# EAGLE board CT_schematic (EAGLE 7.6.0)

Size 100 x 80 mm. Coordinates in mm from the lower left corner, seen from the top.
Outline: 0,0 100,0 100,80 0,80 0,0
Copper layers (1*16): Top 0.035mm / dielectric 1.5mm / Bottom 0.035mm
Design rules "default": minimum track width 10mil, minimum drill 24mil, track to track 8mil, track to pad 8mil, pad to pad 8mil, via to via 8mil, smd to smd 8mil, copper to edge 40mil, drill to drill 8mil, minimum pad ring 10mil, minimum via ring 8mil, stop-mask expansion 4mil, vias tented up to drill 0mil, thermal gap 10mil

## Footprints (pad centres in the part's own frame; a part is rotated, then mirrored left to right if it is on the bottom)
C0603 = smd 0.8 x 0.8: 1 -0.762,0; 2 0.762,0
C0402 = smd 0.5 x 0.5: 1 -0.508,0; 2 0.508,0
C0805 = smd 1.2 x 1.3: 1 -1.016,0; 2 1.016,0
C1206 = smd 1.3 x 1.6: 1 -1.524,0; 2 1.524,0
L0603 = smd 0.8 x 0.8: 1 -0.762,0; 2 0.762,0
L1210 = smd 1.2 x 2.5: 1 -1.524,0; 2 1.524,0
L0806 = smd 1.016 x 1.524: 1 -0.889,0; 2 0.889,0
R0603 = smd 0.8 x 0.8: 1 -0.762,0; 2 0.762,0
UFQFPN48 = smd 0.559 x 0.305: 1 -3.375,2.751; 2 -3.375,2.251; 3 -3.375,1.75; 4 -3.375,1.25; 5 -3.375,0.75; 6 -3.375,0.25; 7 -3.375,-0.25; 8 -3.375,-0.75; 9 -3.375,-1.25; 10 -3.375,-1.75; 11 -3.375,-2.251; 12 -3.375,-2.751; 25 3.375,-2.751; 26 3.375,-2.251; 27 3.375,-1.75; 28 3.375,-1.25; 29 3.375,-0.75; 30 3.375,-0.25; 31 3.375,0.25; 32 3.375,0.75; 33 3.375,1.25; 34 3.375,1.75; 35 3.375,2.251; 36 3.375,2.751 | smd 0.305 x 0.559: 13 -2.751,-3.375; 14 -2.251,-3.375; 15 -1.75,-3.375; 16 -1.25,-3.375; 17 -0.75,-3.375; 18 -0.25,-3.375; 19 0.25,-3.375; 20 0.75,-3.375; 21 1.25,-3.375; 22 1.75,-3.375; 23 2.251,-3.375; 24 2.751,-3.375; 37 2.751,3.375; 38 2.251,3.375; 39 1.75,3.375; 40 1.25,3.375; 41 0.75,3.375; 42 0.25,3.375; 43 -0.25,3.375; 44 -0.75,3.375; 45 -1.25,3.375; 46 -1.75,3.375; 47 -2.251,3.375; 48 -2.751,3.375 | smd 5.588 x 5.588: 49 0,0
SAMTEC_FTSH-105-01-L-DV-K = smd 0.762 x 2.794: 1 -2.54,-2.032; 2 -2.54,2.032; 3 -1.27,-2.032; 4 -1.27,2.032; 5 0,-2.032; 6 0,2.032; 7 1.27,-2.032; 8 1.27,2.032; 9 2.54,-2.032; 10 2.54,2.032
SSOP-16 = smd 1.981 x 0.356: 1 -2.464,2.223; 2 -2.464,1.587; 3 -2.464,0.953; 4 -2.464,0.318; 5 -2.464,-0.318; 6 -2.464,-0.953; 7 -2.464,-1.587; 8 -2.464,-2.223; 9 2.464,-2.223; 10 2.464,-1.587; 11 2.464,-0.953; 12 2.464,-0.318; 13 2.464,0.318; 14 2.464,0.953; 15 2.464,1.587; 16 2.464,2.223
182-009-MALE = drill 1.194 pad 1.524 octagon: 1 -5.537,10.923; 2 -2.769,10.923; 3 0,10.923; 4 2.769,10.923; 5 5.537,10.923; 6 -4.153,8.08; 7 -1.384,8.08; 8 1.384,8.08; 9 4.153,8.08 | hole 3.048: -12.446,9.501; 12.446,9.501
FCI_10118193-0001LF = smd 0.4 x 1.35: 1 -1.3,2.675; 2 -0.65,2.675; 3 0,2.675; 4 0.65,2.675; 5 1.3,2.675 | smd 1.6 x 1.4: 6 -3.2,2.45; 7 3.2,2.45 | smd 1.9 x 1.9: 8 -1.2,0; 9 1.2,0 | hole 0.5: -3.3,0; 3.3,0
SOT143B = smd 1 x 0.7: 1 -0.75,-1 | smd 0.6 x 0.7: 2 0.95,-1; 3 0.95,1; 4 -0.95,1
ABLS-25.000MHZ-B2F-T = smd 5.6 x 2.8: 1 -3.81,0; 2 5.69,0
ASEK = smd 1.4 x 1: 1 -1.1,-0.8; 2 1.1,-0.8; 3 1.1,0.8; 4 -1.1,0.8
TSOT-23-5 = smd 1.3 x 0.62: 1 -1.31,0.95; 2 -1.31,0; 3 -1.31,-0.95; 4 1.31,-0.95; 5 1.31,0.95
DFN8_2X3MC = smd 0.813 x 0.305: 1 -1.398,0.75; 2 -1.398,0.25; 3 -1.398,-0.25; 4 -1.398,-0.75; 5 1.398,-0.75; 6 1.398,-0.25; 7 1.398,0.25; 8 1.398,0.75 | smd 1.753 x 1.549: 9 0,0
JST-2-SMD = smd 1 x 4.6: 1 -1,-3.7; 2 1,-3.7 | smd 1.6 x 3.4: NC1 -3.4,1.5; NC2 3.4,1.5
SON-6 = smd 0.55 x 0.3: 1 -0.355,0.5 | smd 0.52 x 0.3: 2 -0.37,0; 3 -0.37,-0.5; 4 0.37,-0.5; 5 0.37,0; 6 0.37,0.5
SW_4-1437565-2 = smd 1.4 x 2.1: 1 -2.23,4.55; 2 -2.23,-4.55; 3 2.23,4.55; 4 2.23,-4.55
LGM67K-G1J2-24-Z = smd 0.8 x 1.4: A -2,0; C 0,0
NC7SZ125M5X = smd 1.3 x 0.7: 1 -1.3,0.95; 2 -1.3,0; 3 -1.3,-0.95; 4 1.3,-0.95; 5 1.3,0.95

## Placement (x,y rotation side)
C1  1e-07  [C0603]  -22.86,71.12 0 top  (outside the outline)
C2  1e-07  [C0603]  -26.67,71.12 0 top  (outside the outline)
C3  1e-07  [C0603]  -30.48,71.12 0 top  (outside the outline)
C4  1e-07  [C0603]  -34.29,71.12 0 top  (outside the outline)
C5  4.7e-06  [C0603]  -15.24,71.12 0 top  (outside the outline)
C6  1e-07  [C0603]  -38.1,71.12 0 top  (outside the outline)
C7  1e-08  [C0603]  -41.91,71.12 0 top  (outside the outline)
C8  1e-06  [C0603]  -45.72,71.12 0 top  (outside the outline)
C9  1e-11  [C0402]  -34.29,76.2 0 top  (outside the outline)
C10  1e-11  [C0402]  -38.1,76.2 0 top  (outside the outline)
C11  1e-07  [C0402]  -41.91,76.2 0 top  (outside the outline)
C12  1e-06  [C0603]  -49.53,71.12 0 top  (outside the outline)
C13  1e-06  [C0603]  -53.34,71.12 0 top  (outside the outline)
C14  2.2e-07  [C0603]  -19.05,71.12 0 top  (outside the outline)
C15  1e-06  [C0603]  -57.15,71.12 0 top  (outside the outline)
C16  1e-06  [C0603]  -60.96,71.12 0 top  (outside the outline)
C17  1e-08  [C0402]  -45.72,76.2 0 top  (outside the outline)
C18  1e-05  [C0805]  -46.99,59.69 0 top  (outside the outline)
C19  1e-05  [C0805]  -52.07,59.69 0 top  (outside the outline)
C20  1e-07  [C0402]  -49.53,76.2 0 top  (outside the outline)
C21  1e-05  [C1206]  -16.51,59.69 0 top  (outside the outline)
C22  1e-05  [C1206]  -22.86,59.69 0 top  (outside the outline)
C23  1e-08  [C0402]  -53.34,76.2 0 top  (outside the outline)
C24  1e-08  [C0402]  -57.15,76.2 0 top  (outside the outline)
F1  240.0  [L0603]  -64.77,71.12 0 top  (outside the outline)
I1  1e-05  [L1210]  -68.58,52.07 0 top  (outside the outline)
I2  3.3e-06  [L0806]  -29.21,59.69 0 top  (outside the outline)
R1  10000.0  [R0603]  -30.48,66.04 0 top  (outside the outline)
R2  1000.0  [R0603]  -68.58,71.12 0 top  (outside the outline)
R3  1600.5  [R0603]  -15.24,76.2 0 top  (outside the outline)
R4  4700.0  [R0603]  -19.05,76.2 0 top  (outside the outline)
R5  10000.0  [R0603]  -35.56,66.04 0 top  (outside the outline)
R6  10000.0  [R0603]  -40.64,66.04 0 top  (outside the outline)
R7  10000.0  [R0603]  -45.72,66.04 0 top  (outside the outline)
R8  10000.0  [R0603]  -50.8,66.04 0 top  (outside the outline)
R9  10000.0  [R0603]  -55.88,66.04 0 top  (outside the outline)
R10  5.0  [R0603]  -22.86,76.2 0 top  (outside the outline)
R11  100000.0  [R0603]  -69.85,59.69 0 top  (outside the outline)
R12  220000.0  [R0603]  -15.24,66.04 0 top  (outside the outline)
R13  1000000.0  [R0603]  -64.77,59.69 0 top  (outside the outline)
R14  10000.0  [R0603]  -60.96,66.04 0 top  (outside the outline)
R15  10000.0  [R0603]  -66.04,66.04 0 top  (outside the outline)
R16  9100.0  [R0603]  -26.67,76.2 0 top  (outside the outline)
R17  680000.0  [R0603]  -20.32,66.04 0 top  (outside the outline)
R18  120000.0  [R0603]  -25.4,66.04 0 top  (outside the outline)
R19  2000.0  [R0603]  -30.48,76.2 0 top  (outside the outline)
R20  10000.0  [R0603]  -71.12,66.04 0 top  (outside the outline)
U1  STM32L151C8U6  [UFQFPN48]  -53.34,41.91 0 top  (outside the outline)
U2  FTSH-105-01-L-DV-K  [SAMTEC_FTSH-105-01-L-DV-K]  -35.56,30.48 0 top  (outside the outline)
U3  LTC2804CGN-1#PBF  [SSOP-16]  -44.45,43.18 0 top  (outside the outline)
U4  182-009-113R531  [182-009-MALE]  -36.83,6.35 0 top  (outside the outline)
U5  10118193-0001LF  [FCI_10118193-0001LF]  -64.77,40.64 0 top  (outside the outline)
U6  prtr5v0u2ax  [SOT143B]  -69.85,76.2 0 top  (outside the outline)
U7  ABLS-25.000MHZ-B2F-T  [ABLS-25.000MHZ-B2F-T]  -45.72,53.34 0 top  (outside the outline)
U8  ASEK-32.768KHz-ECST  [ASEK]  -29.21,53.34 0 top  (outside the outline)
U9  ltc3406es5  [TSOT-23-5]  -57.15,59.69 0 top  (outside the outline)
U10  MCP73831T-2ACI/MC  [DFN8_2X3MC]  -20.32,80.01 0 top  (outside the outline)
U11  S2B-PH-SM4-TB(LF)(SN)  [JST-2-SMD]  -22.86,44.45 0 top  (outside the outline)
U12  TPS3895ADRYR  [SON-6]  -13.97,80.01 0 top  (outside the outline)
U13  4-1437565-2  [SW_4-1437565-2]  -57.15,27.94 0 top  (outside the outline)
U14  Q65110A2395  [LGM67K-G1J2-24-Z]  -57.15,52.07 0 top  (outside the outline)
U15  nc7sz125m5x  [NC7SZ125M5X]  -34.29,59.69 0 top  (outside the outline)
U16  nc7sz125m5x  [NC7SZ125M5X]  -40.64,59.69 0 top  (outside the outline)

## Library data of the parts
C1-C24 F1 I1 I2 R1-R20 U1-U16 = circuit_tree

## Nets
CLK_CRYSTAL_U1_5: C9.1 U1.5 U7.1
CLK_CRYSTAL_U1_6: C10.1 U1.6 U7.2
CLK_U1_3: U1.3 U8.3
GND: C1.2 C2.2 C3.2 C4.2 C5.2 C6.2 C7.2 C8.2 C9.2 C10.2 C11.2 C12.2 C13.2 C15.2 C16.2 C17.2 C18.2 C19.1 C19.2 C20.2 C21.2 C22.2 C23.2 C24.2 R2.2 R5.2 R9.2 R10.2 R12.2 R16.2 R18.2 R19.2 U1.8 U1.23 U1.35 U1.47 U1.49 U2.3 U2.5 U3.8 U4.5 U5.5 U5.6 U5.7 U5.8 U5.9 U6.1 U8.2 U9.2 U10.6 U10.9 U11.2 U12.2 U14.C U15.2 U15.3 U16.1 U16.3
INPUT_USBPOWER_5V: C21.1 R20.2 U5.1 U6.4 U10.1 U10.2
NET_U1_1: C6.1 U1.1
NET_U1_7: R4.1 U1.7 U16.4
NET_U1_9: C7.1 C8.1 F1.1 U1.9
NET_U1_44: R5.1 U1.44
NET_U1_45: R3.1 U1.45 U14.A
NET_U1_46: R1.1 U1.46 U13.3 U13.4
NET_U2_9: R10.1 U2.9
NET_U3_6: C12.1 U3.6
NET_U3_7: C14.1 I1.2 U3.7
NET_U3_9: C13.1 U3.9
NET_U3_10: C14.2 U3.10
NET_U3_11: R11.1 U3.11
NET_U4_2: U3.1 U4.2
NET_U4_3: U3.3 U4.3
NET_U4_7: U3.2 U4.7
NET_U4_8: U3.4 U4.8
NET_U9_1: U9.1
NET_U9_3: I2.1 U9.3
NET_U9_5: R12.1 R13.1 U9.5
NET_U9_ATNET_3: I2.2 R13.2
NET_U10_5: R20.1 U10.5
NET_U10_8: R19.1 U10.8
NET_U12_1: R15.1 R16.1 U12.1
NET_U12_3: R17.2 R18.1 U12.3
NET_U12_4: R14.1 U12.4 U15.4 U16.2
NET_U13_1: R2.1 U13.1 U13.2
PROC_SYS_JTCK_SWCLK: R9.1 U1.37 U2.4
PROC_SYS_JTDI: R7.1 U1.38 U2.8
PROC_SYS_JTDO_TRACESWO: U1.39 U2.6
PROC_SYS_JTMS_SWDIO: R8.1 U1.34 U2.2
PROC_USART2_CTS: U1.10 U3.13
PROC_USART2_RTS: U1.11 U3.15
PROC_USART2_RX: U1.13 U3.16
PROC_USART2_TX: U1.12 U3.14
PROC_USB_DM: U1.32 U5.2 U6.3
PROC_USB_DP: U1.33 U5.3 U6.2
RST_OUT_U2_JTAG_RST_B: R6.1 U2.10 U15.1
VCC_S1_3V7: C18.1 C22.1 U9.4 U10.3 U10.4 U11.1
VCC_TIER1_3V3: C1.1 C2.1 C3.1 C4.1 C5.1 C11.1 C15.1 C16.1 C17.1 C19.2 C20.1 C23.1 C24.1 F1.2 I1.1 I2.2 R1.2 R3.2 R4.2 R6.2 R7.2 R8.2 R11.2 R13.2 R14.2 R15.2 R17.1 U1.24 U1.36 U1.48 U2.1 U3.5 U3.12 U8.4 U12.6 U15.5 U16.5

## Tracks (layer width: path | path; a pad name or v marks a point on that pad's centre or on a via)
CLK_CRYSTAL_U1_5  (2 unrouted)
CLK_CRYSTAL_U1_6  (2 unrouted)
CLK_U1_3  (1 unrouted)
GND  (57 unrouted)
INPUT_USBPOWER_5V  (5 unrouted)
NET_U1_1  (1 unrouted)
NET_U1_7  (2 unrouted)
NET_U1_9  (3 unrouted)
NET_U1_44  (1 unrouted)
NET_U1_45  (2 unrouted)
NET_U1_46  (3 unrouted)
NET_U2_9  (1 unrouted)
NET_U3_6  (1 unrouted)
NET_U3_7  (2 unrouted)
NET_U3_9  (1 unrouted)
NET_U3_10  (1 unrouted)
NET_U3_11  (1 unrouted)
NET_U4_2  (1 unrouted)
NET_U4_3  (1 unrouted)
NET_U4_7  (1 unrouted)
NET_U4_8  (1 unrouted)
NET_U9_3  (1 unrouted)
NET_U9_5  (2 unrouted)
NET_U9_ATNET_3  (1 unrouted)
NET_U10_5  (1 unrouted)
NET_U10_8  (1 unrouted)
NET_U12_1  (2 unrouted)
NET_U12_3  (2 unrouted)
NET_U12_4  (3 unrouted)
NET_U13_1  (2 unrouted)
PROC_SYS_JTCK_SWCLK  (2 unrouted)
PROC_SYS_JTDI  (2 unrouted)
PROC_SYS_JTDO_TRACESWO  (1 unrouted)
PROC_SYS_JTMS_SWDIO  (2 unrouted)
PROC_USART2_CTS  (1 unrouted)
PROC_USART2_RTS  (1 unrouted)
PROC_USART2_RX  (1 unrouted)
PROC_USART2_TX  (1 unrouted)
PROC_USB_DM  (2 unrouted)
PROC_USB_DP  (2 unrouted)
RST_OUT_U2_JTAG_RST_B  (2 unrouted)
VCC_S1_3V7  (5 unrouted)
VCC_TIER1_3V3  (36 unrouted)